# Altium PCB PCB.PcbDoc
Units mm, origin at the board's own origin, x right, y up, seen from the top; angles counter-clockwise.
Board outline 38.61 x 38.61 mm, 4 copper layers (Top Layer, Signal Layer 1, Signal Layer 2, Bottom Layer), stack 1.54 mm thick; 17 components, 95 nets, 294 pads, 81 vias.
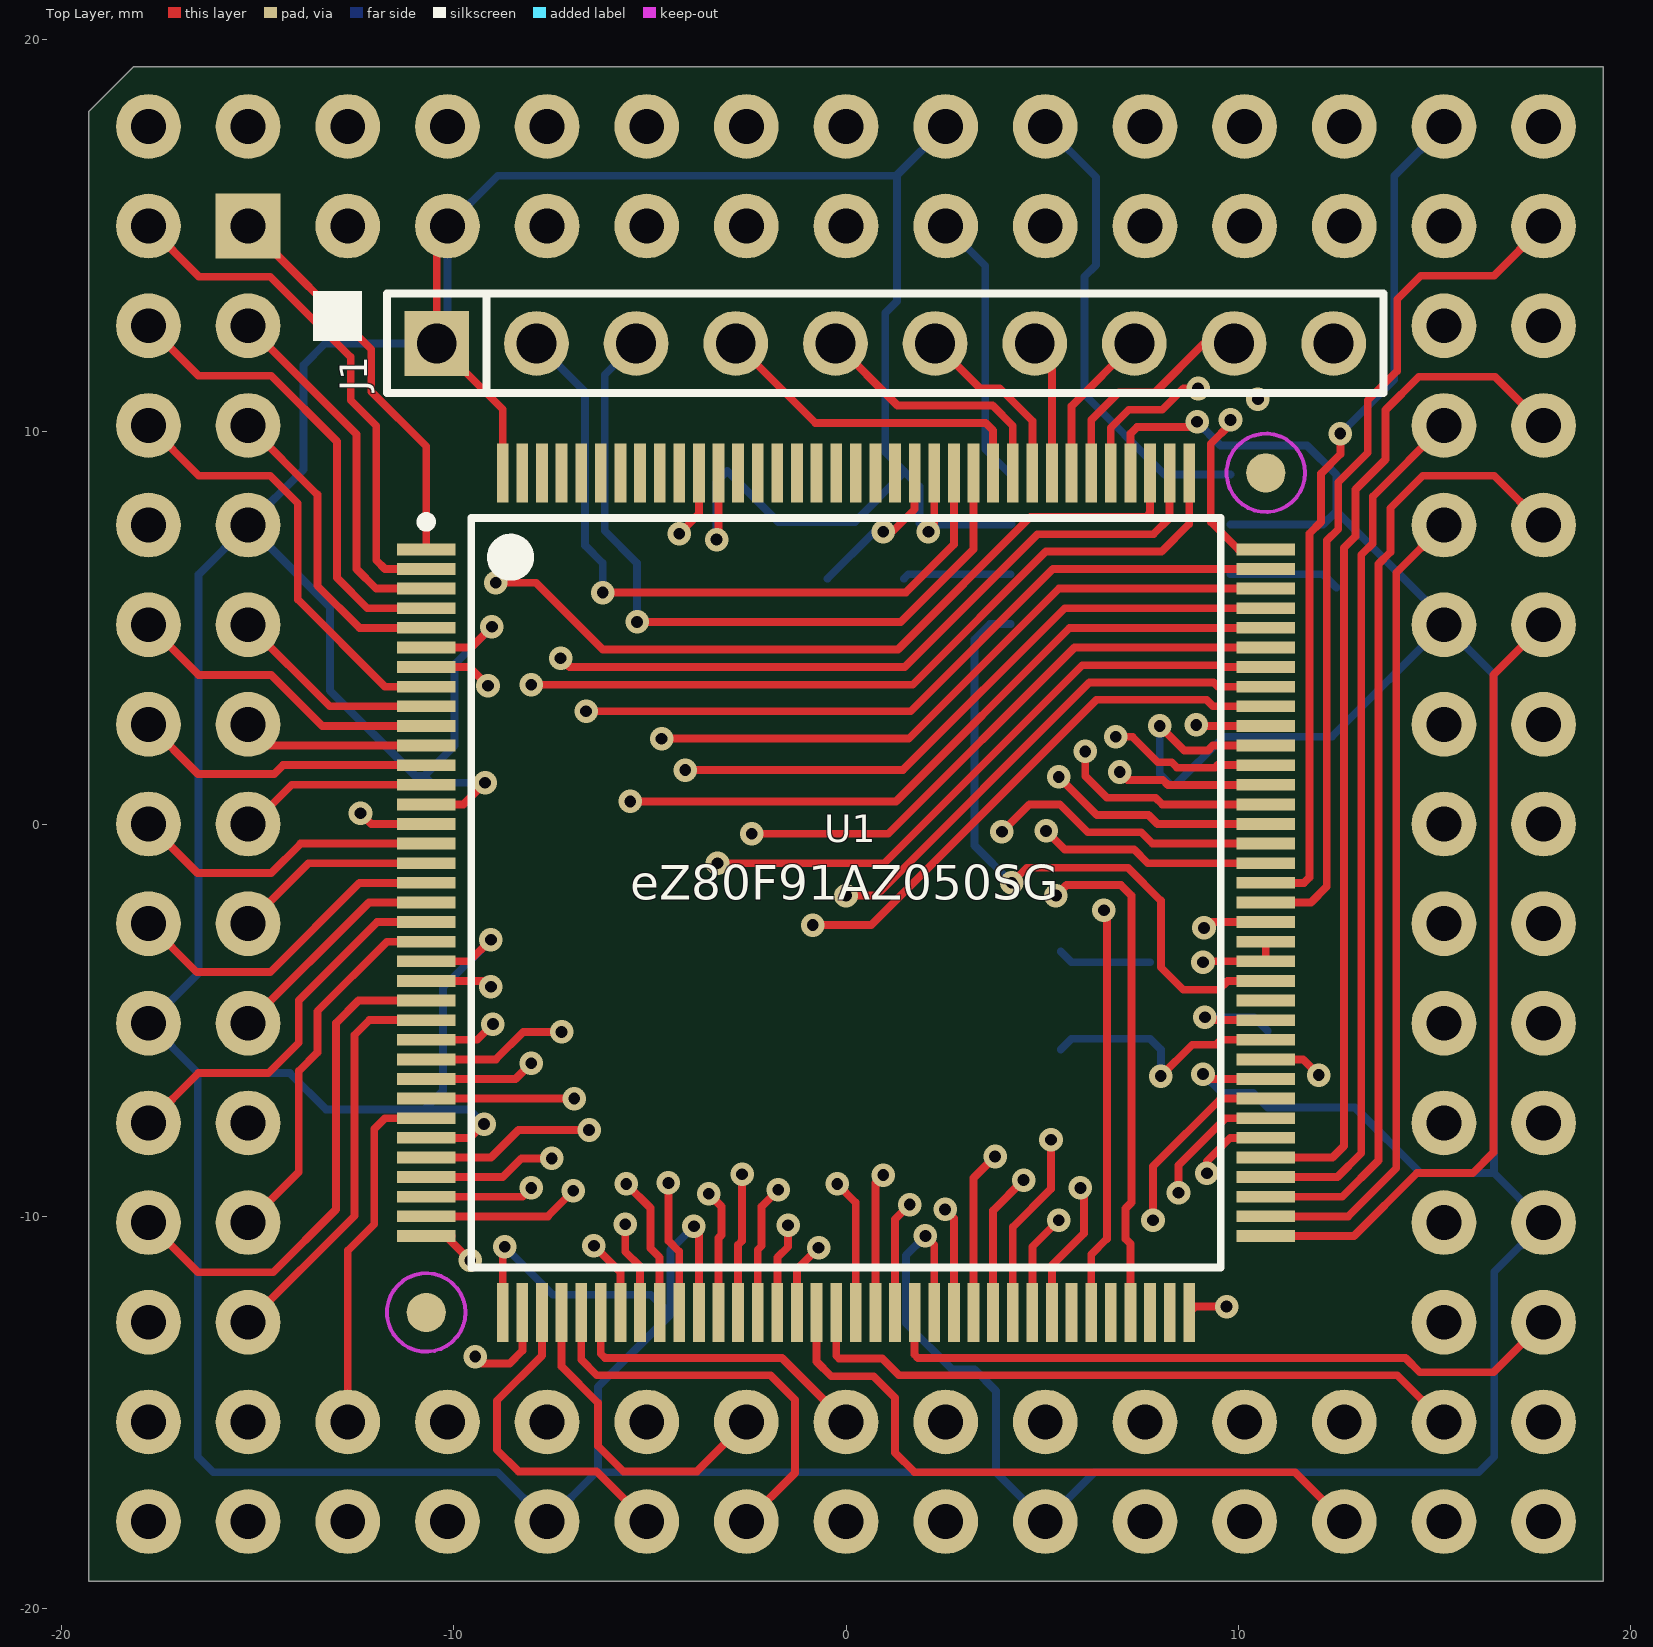
[diagram p0: Top Layer view]
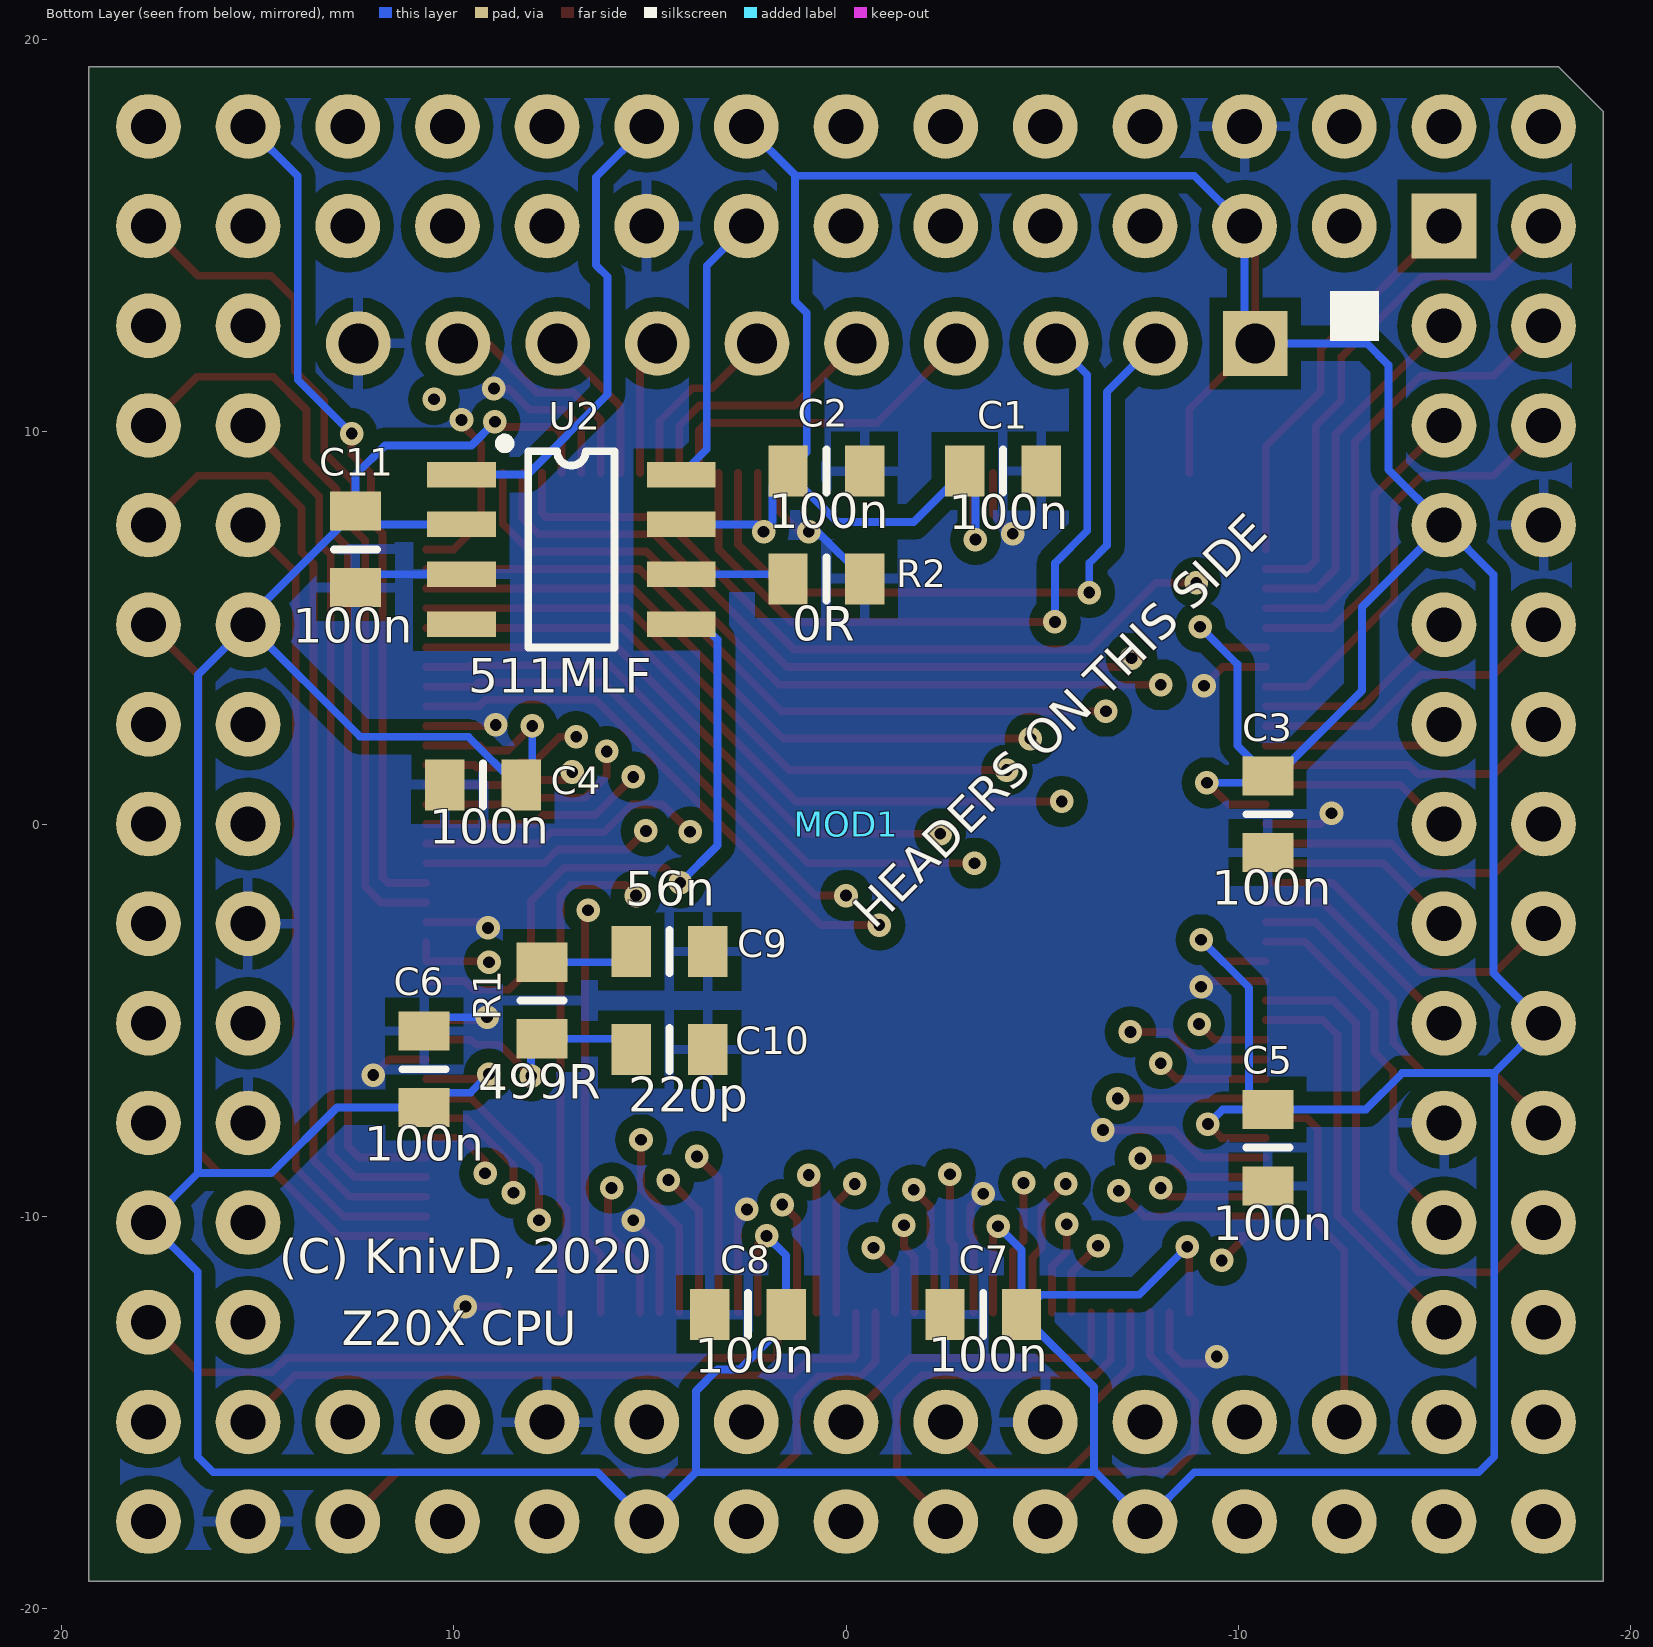
[diagram p1: Bottom Layer view, seen from below]
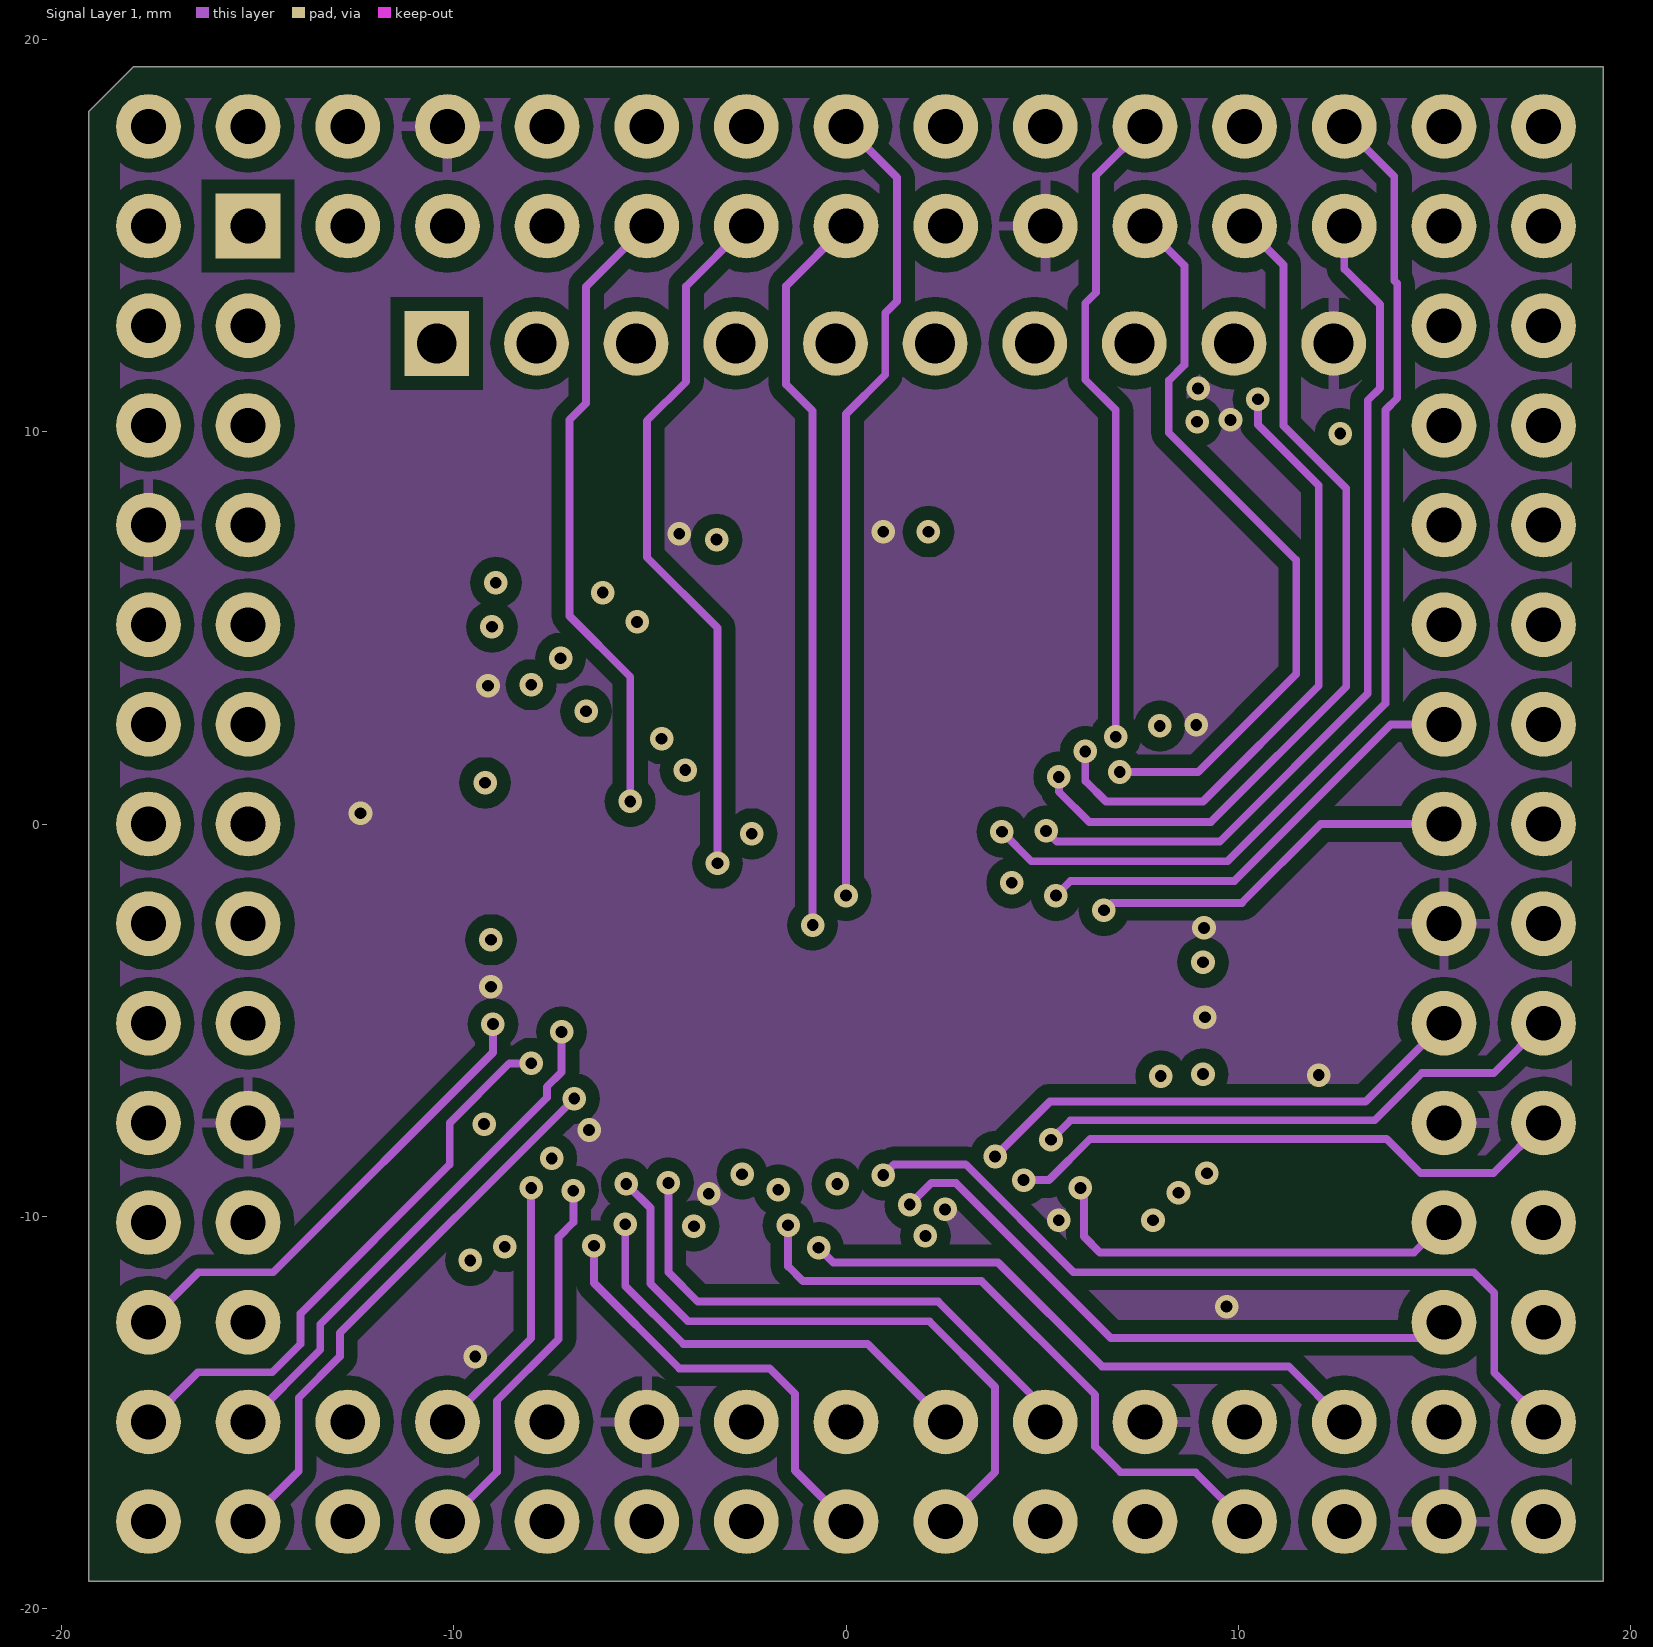
[diagram p2: Signal Layer 1]
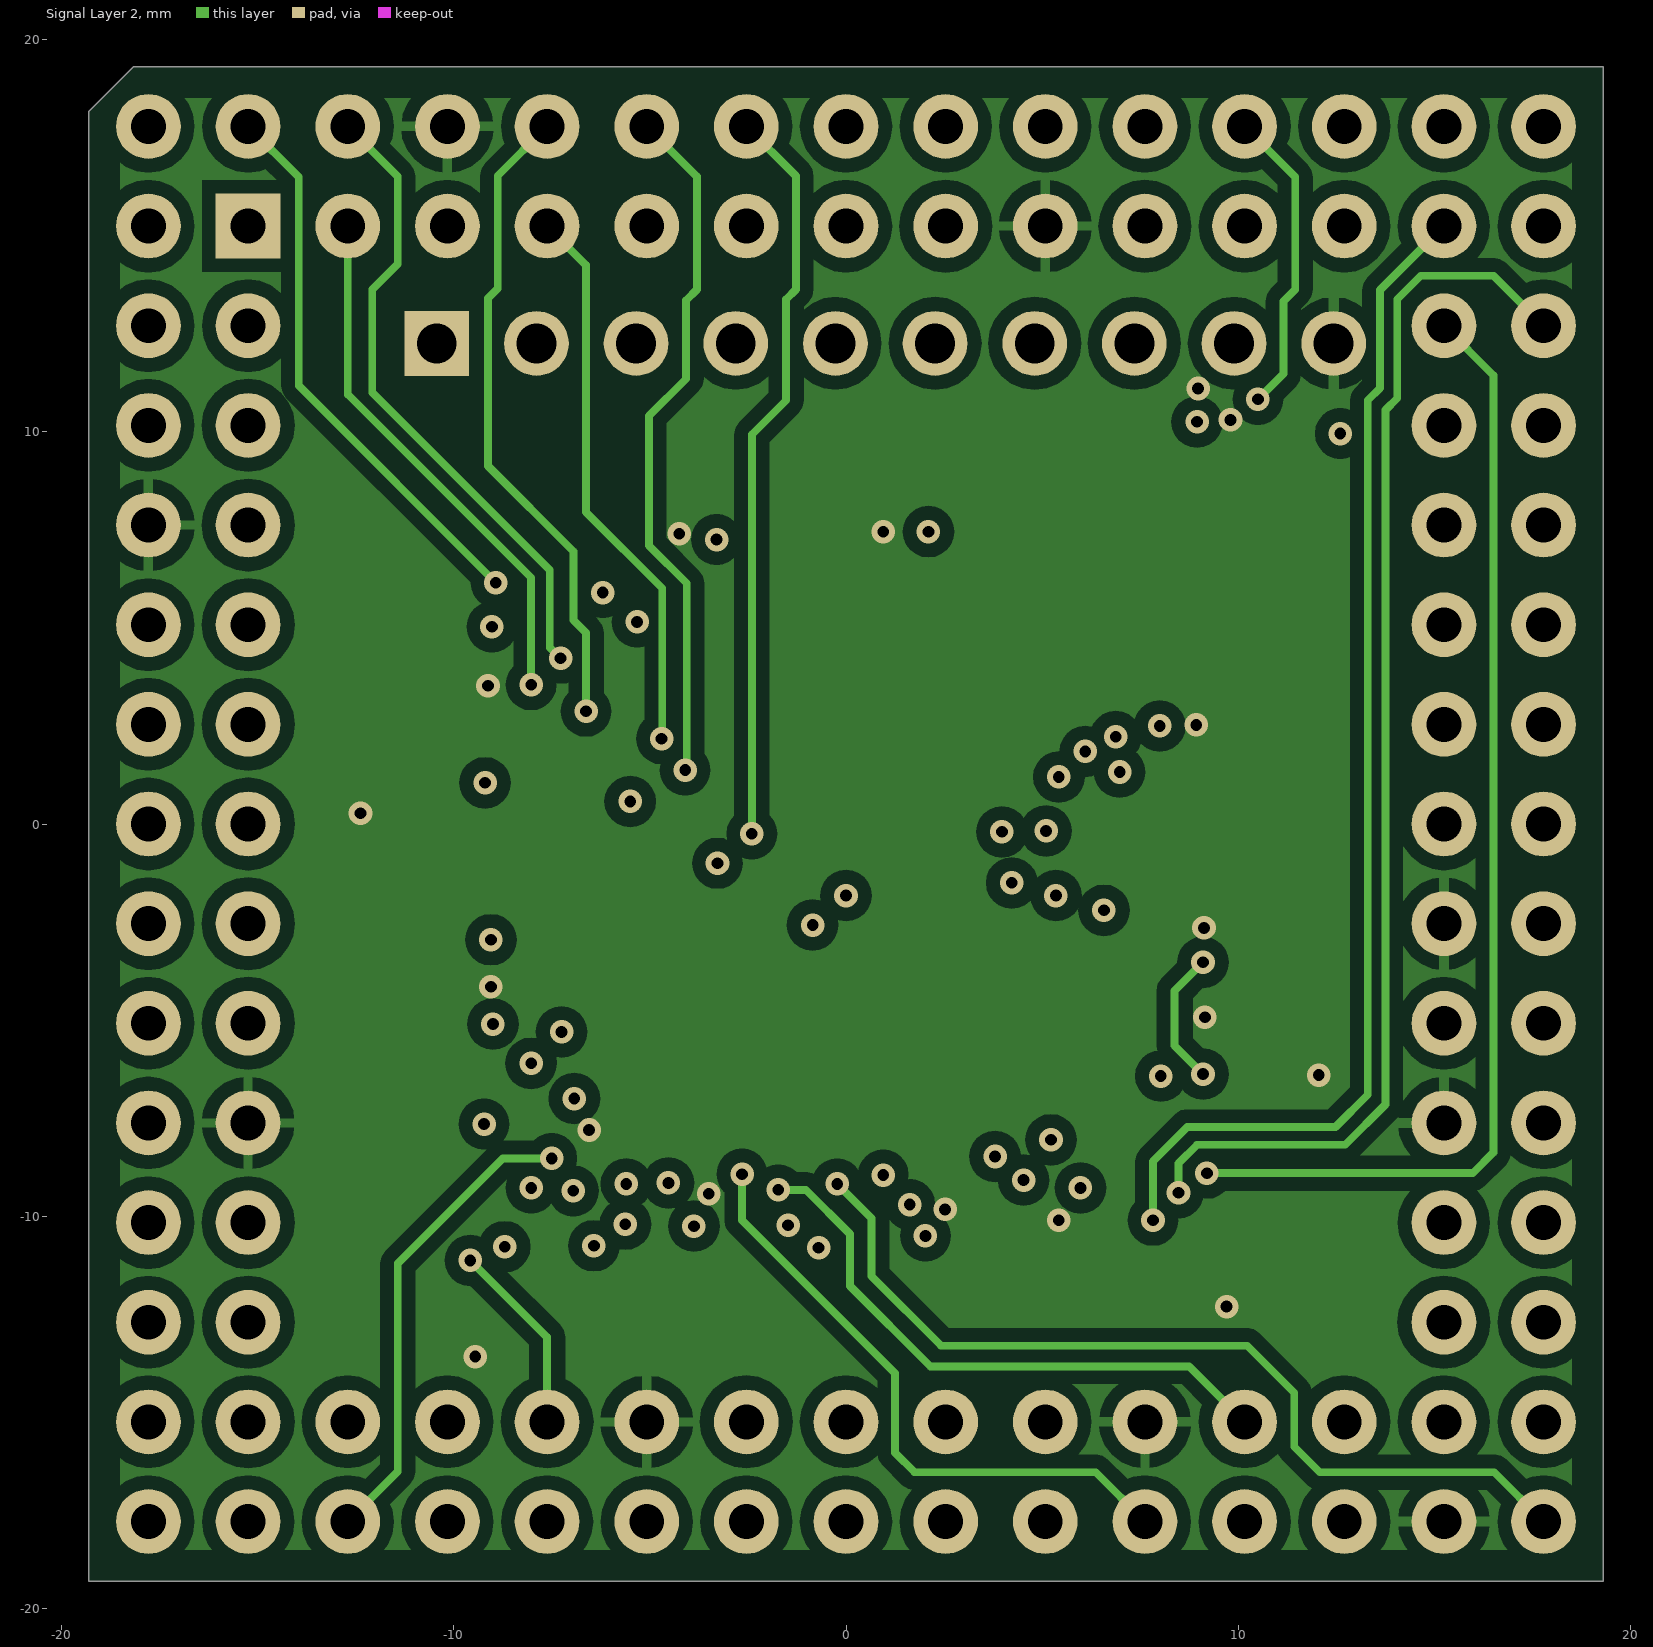
[diagram p3: Signal Layer 2]
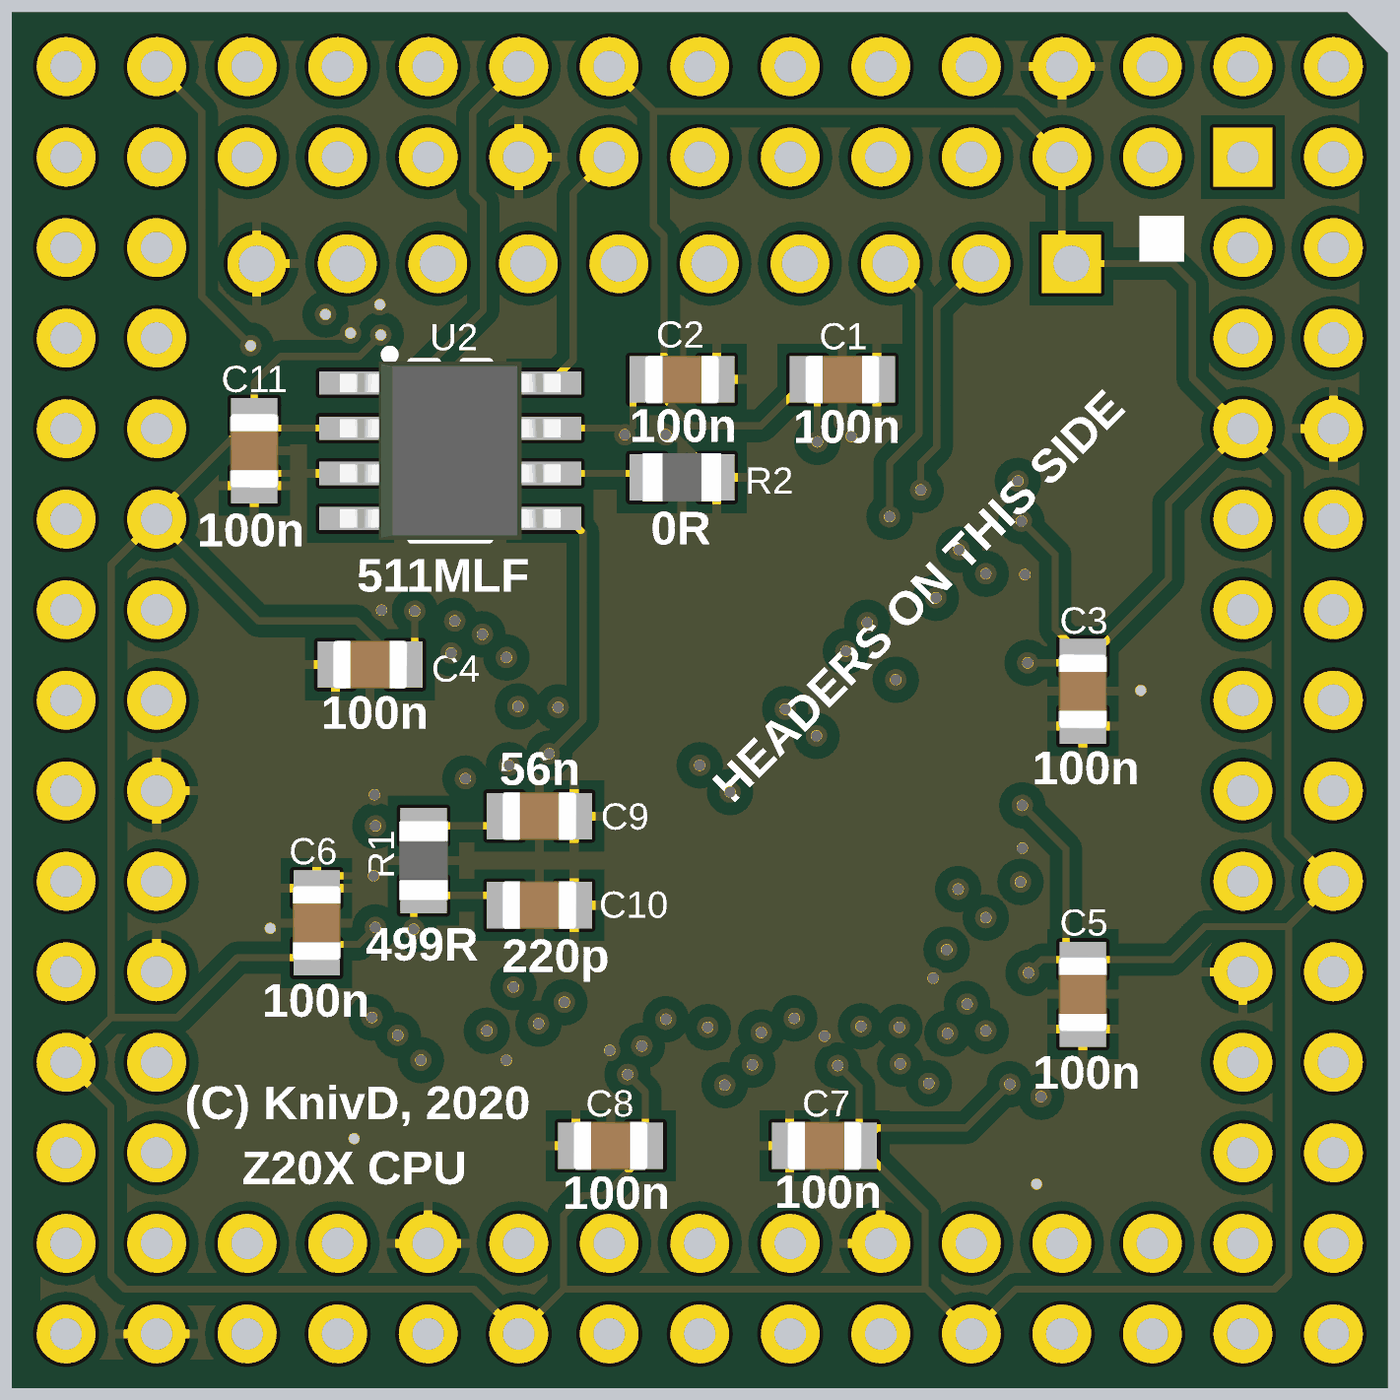
[diagram p4: 3D render of the assembled board from below, using the file's embedded part models]

## Layer stack, top to bottom
Top Solder: solder mask 0.0102, Solder Resist, Dk 3.5
Top Layer: signal copper 0.0356
Dielectric 1: core 0.508, FR-4, Dk 4.2
Signal Layer 1: signal copper 0.036
Dielectric 3: prepreg 0.381, Dk 4.2
Signal Layer 2: signal copper 0.036
Dielectric 2: core 0.508, Dk 4.2
Bottom Layer: signal copper 0.0356
Solder Side: solder mask 0.0102, Solder Resist, Dk 3.5

## Board outline
-19.304,-19.304 -19.304,18.161 -18.161,19.304 19.304,19.304 19.304,-19.304

## Design rules (kind name [scope] priority, off if disabled: settings)
Clearance Clearance_Poly [(IsRegion)] p1: gap=0.35 ignorepadtopadclearanceinfootprint=TRUE
Clearance [All] p2: gap=0.24 ignorepadtopadclearanceinfootprint=TRUE
DiffPairsRouting [All] p1: maxlimit=1 minlimit=0.15 mostfreqgap=0.2 toplayer_minwidth=0.2 toplayer_maxwidth=1 toplayer_prefwidth=0.2 midlayer1_minwidth=0.2 midlayer1_maxwidth=1 midlayer1_prefwidth=0.2 midlayer2_minwidth=0.2 midlayer2_maxwidth=1 midlayer2_prefwidth=0.2 bottomlayer_minwidth=0.2 bottomlayer_maxwidth=1 bottomlayer_prefwidth=0.2 maxuncoupledlength=12.7
HoleSize [All] p1 off: absolutevalues=TRUE maxlimit=2.5 minlimit=0.025 maxpercent=80.000 minpercent=20.000
HoleToHoleClearance [All] p1 off: gap=0 allowstackedmicrovias=TRUE
LayerPairs [All] p1 off: enforce=TRUE
MaxMinImpedance [InNet('ANT50R')] p1: minimum=49.90 maximum=50.10
MinimumSolderMaskSliver [All] p1 off: minsoldermaskwidth=-50
NetAntennae [All] p1 off: netantennaetolerance=0
PlaneClearance [All] p1: clearance=0.5
PlaneConnect [All] p1: planeconnectstyle=Direct reliefexpansion=0.5 reliefentries=4 reliefconductorwidth=0.35 reliefairgap=0.35
PolygonConnect [All] p1: thpad.connectstyle=Relief thpad.reliefconductorwidth=0.25 thpad.reliefentries=4 thpad.polygonreliefangle="90 Angle" thpad.airgapwidth=0.35 smdpad.connectstyle=Relief smdpad.reliefconductorwidth=0.25 smdpad.reliefentries=4 smdpad.polygonreliefangle="90 Angle" smdpad.airgapwidth=0.35 via.connectstyle=Direct via.reliefconductorwidth=0.35 via.reliefentries=4 via.polygonreliefangle="90 Angle" via.airgapwidth=0.35
RoutingCorners [All] p1: cornerstyle=45-Degree minsetback=2 maxsetback=2
RoutingVias [All] p1: holewidth=0.3 width=0.6 viastyle="Through Hole" minholewidth=0.3 minwidth=0.6 maxholewidth=1 maxwidth=2
SilkToBoardRegionClearance [All] p1 off:
SilkToSilkClearance [All] p1 off: silktosilkclearance=-50
SilkToSolderMaskClearance [IsPad] p1 off: minsilkscreentomaskgap=-50 clearancetoexposedcopper=TRUE
SolderMaskExpansion [All] p1: expansion=0.102
Width [All] p1: maxlimit=0.5 minlimit=0.2 preferedwidth=0.2
18 further rules are at their usual default settings.

## Components (designator, comment, footprint, x,y, rotation, side; value= is the part's Value field where it differs from the comment)
C1 "100n" _0805_CAP -4,9 r180 bottom locked
C2 "100n" _0805_CAP 0.5,9 r0 bottom locked
C3 "100n" _0805_CAP -10.75,0.25 r270 bottom locked
C4 "100n" _0805_CAP 9.25,1 r180 bottom locked
C5 "100n" _0805_CAP -10.75,-8.25 r270 bottom locked
C6 "100n" _0805_CAP 10.75,-6.25 r90 bottom locked
C7 "100n" _0805_CAP -3.5,-12.5 r0 bottom locked
C8 "100n" _0805_CAP 2.5,-12.5 r0 bottom locked
C9 "56n" _0805_CAP 4.5,-3.25 r180 bottom locked
C10 "220p" _0805_CAP 4.5,-5.75 r180 bottom locked
C11 "100n" _0805_CAP 12.5,7 r90 bottom locked
J1 "DNF" 2011-1X10S 1,12.25 r0 top locked
MOD1 "Z20X CPU Module" PGA100X15 0,0 r0 bottom locked
R1 "499R" _0805_RES 7.75,-4.5 r90 bottom locked
R2 "0R" _0805_RES 0.5,6.25 r0 bottom locked
U1 "eZ80F91AZ050SG" QFP50P2200X2200X160-144N 0,-1.75 r0 top locked
U2 "511MLF" SOIC8 7,7 r270 bottom locked

## Footprints (in the part's own frame and the unit in brackets; to place one, negate y for a bottom-side part, rotate by r counter-clockwise, add the part's x,y. Pads: shape width x height; smd on the part's side, far side on the other; paste and mask are expansions set on the pad)
2011-1X10S [mil] "2011-1X10 Straight Pin Header"
  rect 65x65 hole 40: 1(-450,0)
  round 65 hole 40: 2(-350,0) 3(-250,0) 4(-150,0) 5(-50,0) 6(50,0) 7(150,0) 8(250,0) 9(350,0) 10(450,0)
  silkscreen extent -500,-50 500,50
_0805_CAP [mm]
  rect 1x1.3 smd: 1(-0.975,0) 2(0.975,0)
  silkscreen extent 0,-0.55 0,0.55, body extent -1.05,-0.67 1.05,0.68, height 1.1
_0805_RES [mm]
  rect 1x1.3 smd: 1(-0.975,0) 2(0.975,0)
  silkscreen extent 0,-0.55 0,0.55, body extent -1.1,-0.67 1.1,0.67, height 0.6
PGA100X15 [mil] "PGA module, 100 pins, 2.54 pitch"
  rect 65x65 hole 35: 1(-600,-600)
  round 65 hole 35: 2(-700,-600) 3(-600,-500) 4(-700,-500) 5(-600,-400) 6(-700,-400) 7(-600,-300) 8(-700,-300) 9(-600,-200) 10(-700,-200) 11(-600,-100) 12(-700,-100) 13(-600,0) 14(-700,0) 15(-600,100) 16(-700,100) 17(-600,200) 18(-700,200) 19(-600,300) 20(-700,300) 21(-600,400) 22(-700,400) 23(-600,500) 24(-700,500) 25(-600,600) 26(-700,600) 27(-600,700) 28(-500,600) 29(-500,700) 30(-400,600) 31(-400,700) 32(-300,600) 33(-300,700) 34(-200,600) 35(-200,700) 36(-100,600) 37(-100,700) 38(0,600) 39(0,700) 40(100,600) 41(100,700) 42(200,600) 43(200,700) 44(300,600) 45(300,700) 46(400,600) 47(400,700) 48(500,600) 49(500,700) 50(600,600) 51(600,700) 52(700,600) 53(600,500) 54(700,500) 55(600,400) 56(700,400) 57(600,300) 58(700,300) 59(600,200) 60(700,200) 61(600,100) 62(700,100) 63(600,0) 64(700,0) 65(600,-100) 66(700,-100) 67(600,-200) 68(700,-200) 69(600,-300) 70(700,-300) 71(600,-400) 72(700,-400) 73(600,-500) 74(700,-500) 75(600,-600) 76(700,-600) 77(600,-700) 78(500,-600) 79(500,-700) 80(400,-600) 81(400,-700) 82(300,-600) 83(300,-700) 84(200,-600) 85(200,-700) 86(100,-600) 87(100,-700) 88(0,-600) 89(0,-700) 90(-100,-600) 91(-100,-700) 92(-200,-600) 93(-200,-700) 94(-300,-600) 95(-300,-700) 96(-400,-600) 97(-400,-700) 98(-500,-600) 99(-500,-700) 100(-600,-700) 101(-700,-700) 102(-700,700) 103(700,700) 104(700,-700)
  silkscreen extent -535,-535 -486,-485
QFP50P2200X2200X160-144N [mm] "QFP, 144-Leads, Body 20x20mm (BSC), Pitch 0.50mm, IPC Medium Density"
  round 1 smd paste-0.51 mask+0.5: 0(-10.7,-10.7) 0(10.7,10.7)
  rect 1.5x0.3 smd: 1(-10.7,8.75) 2(-10.7,8.25) 3(-10.7,7.75) 4(-10.7,7.25) 5(-10.7,6.75) 6(-10.7,6.25) 7(-10.7,5.75) 8(-10.7,5.25) 9(-10.7,4.75) 10(-10.7,4.25) 11(-10.7,3.75) 12(-10.7,3.25) 13(-10.7,2.75) 14(-10.7,2.25) 15(-10.7,1.75) 16(-10.7,1.25) 17(-10.7,0.75) 18(-10.7,0.25) 19(-10.7,-0.25) 20(-10.7,-0.75) 21(-10.7,-1.25) 22(-10.7,-1.75) 23(-10.7,-2.25) 24(-10.7,-2.75) 25(-10.7,-3.25) 26(-10.7,-3.75) 27(-10.7,-4.25) 28(-10.7,-4.75) 29(-10.7,-5.25) 30(-10.7,-5.75) 31(-10.7,-6.25) 32(-10.7,-6.75) 33(-10.7,-7.25) 34(-10.7,-7.75) 35(-10.7,-8.25) 36(-10.7,-8.75) 73(10.7,-8.75) 74(10.7,-8.25) 75(10.7,-7.75) 76(10.7,-7.25) 77(10.7,-6.75) 78(10.7,-6.25) 79(10.7,-5.75) 80(10.7,-5.25) 81(10.7,-4.75) 82(10.7,-4.25) 83(10.7,-3.75) 84(10.7,-3.25) 85(10.7,-2.75) 86(10.7,-2.25) 87(10.7,-1.75) 88(10.7,-1.25) 89(10.7,-0.75) 90(10.7,-0.25) 91(10.7,0.25) 92(10.7,0.75) 93(10.7,1.25) 94(10.7,1.75) 95(10.7,2.25) 96(10.7,2.75) 97(10.7,3.25) 98(10.7,3.75) 99(10.7,4.25) 100(10.7,4.75) 101(10.7,5.25) 102(10.7,5.75) 103(10.7,6.25) 104(10.7,6.75) 105(10.7,7.25) 106(10.7,7.75) 107(10.7,8.25) 108(10.7,8.75)
  rect 0.3x1.5 smd: 37(-8.75,-10.7) 38(-8.25,-10.7) 39(-7.75,-10.7) 40(-7.25,-10.7) 41(-6.75,-10.7) 42(-6.25,-10.7) 43(-5.75,-10.7) 44(-5.25,-10.7) 45(-4.75,-10.7) 46(-4.25,-10.7) 47(-3.75,-10.7) 48(-3.25,-10.7) 49(-2.75,-10.7) 50(-2.25,-10.7) 51(-1.75,-10.7) 52(-1.25,-10.7) 53(-0.75,-10.7) 54(-0.25,-10.7) 55(0.25,-10.7) 56(0.75,-10.7) 57(1.25,-10.7) 58(1.75,-10.7) 59(2.25,-10.7) 60(2.75,-10.7) 61(3.25,-10.7) 62(3.75,-10.7) 63(4.25,-10.7) 64(4.75,-10.7) 65(5.25,-10.7) 66(5.75,-10.7) 67(6.25,-10.7) 68(6.75,-10.7) 69(7.25,-10.7) 70(7.75,-10.7) 71(8.25,-10.7) 72(8.75,-10.7) 109(8.75,10.7) 110(8.25,10.7) 111(7.75,10.7) 112(7.25,10.7) 113(6.75,10.7) 114(6.25,10.7) 115(5.75,10.7) 116(5.25,10.7) 117(4.75,10.7) 118(4.25,10.7) 119(3.75,10.7) 120(3.25,10.7) 121(2.75,10.7) 122(2.25,10.7) 123(1.75,10.7) 124(1.25,10.7) 125(0.75,10.7) 126(0.25,10.7) 127(-0.25,10.7) 128(-0.75,10.7) 129(-1.25,10.7) 130(-1.75,10.7) 131(-2.25,10.7) 132(-2.75,10.7) 133(-3.25,10.7) 134(-3.75,10.7) 135(-4.25,10.7) 136(-4.75,10.7) 137(-5.25,10.7) 138(-5.75,10.7) 139(-6.25,10.7) 140(-6.75,10.7) 141(-7.25,10.7) 142(-7.75,10.7) 143(-8.25,10.7) 144(-8.75,10.7)
  Top Layer keep-out circle w0.1: c-10.7,-10.7 r1
  Top Layer keep-out circle w0.1: c10.7,10.7 r1
  silkscreen extent -10.82,-9.55 9.55,9.57, body extent -11,-11 11,11, height 1.6
SOIC8 [mm] "SOIC8 Package"
  rect 0.65x1.75 smd: 1(-1.905,-2.8) 2(-0.635,-2.8) 3(0.635,-2.8) 4(1.905,-2.8) 5(1.905,2.8) 6(0.635,2.8) 7(-0.635,2.8) 8(-1.905,2.8)
  silkscreen extent -2.82,-1.83 2.5,1.1, body extent -2.5,-3.1 2.5,3.1, height 1.75

## Part data
C1 C2 C3 C4 C5 C6 C7 C8 C9 C10 C11: library part Capacitor, "Capacitor"
J1: library part "Connector 1x10", "Single row, 10-way connector"
R1 R2: library part Resistor, "Resistor"
U1: library part eZ80F91, "eZ80Acclaim!® Flash Microcontrollers", Manufacturer=Zilog
U2: library part ICS511, "LOCO(tm) PLL CLOCK MULTIPLIER"

## Via types
v1: diameter 0.6, hole 0.3, Top Layer to Bottom Layer, tented both sides, 81 vias

## Nets (pads, with @x,y where several pads share a name; then routed paths per layer and width w, separated by ;. In a path a pad name is that pad's centre, name@x,y a point inside that pad or via, vN(x,y) a via of type N, cw(c..) or ccw(c..) an arc to the next point about the centre after c; other vN are vias at no path point)
+3V3: C1.1 C2.2 C3.1 C4.2 C5.1 C6.1 C7.1 C8.1 C11.2 J1.1 MOD1.7 MOD1.18 MOD1.33 MOD1.43 MOD1.56 MOD1.67 MOD1.87 MOD1.96 U1.6 U1.14 U1.22 U1.31 U1.37 U1.47 U1.59 U1.81 U1.87 U1.88 U1.98 U1.112 U1.122 U1.133 U1.144 U2.2 U2.7 | length 242.4
  Top Layer w0.2: U1.31 -9.575,-8 v1(-9.225,-7.65) ; U1.22 -9.6,-3.5 v1(-9.05,-2.95) ; U1.14 -9.75,0.5 v1(-9.2,1.05) ; U1.6 -9.55,4.5 v1(-9.025,5.025) ; MOD1.96 -10.43,14.97 J1.1 -8.75,10.57 U1.144 ; U1.37 -8.75,-10.825 v1(-8.7,-10.775) ; v1(-3.875,-10.25) -3.75,-10.375 U1.47 ; v1(-3.3,7.25) -3.25,7.3 U1.133 ; v1(2.025,-10.5) 2.25,-10.725 U1.59 ; v1(2.1,7.45) 2.25,7.6 U1.122 ; U1.112 7.25,9.95 7.42,10.12 8.82,10.12 v1(8.95,10.25) ; v1(7.997,2.5) 8.622,1.875 9.225,1.875 9.35,2 U1.98 ; v1(9.1,-6.375) 9.225,-6.5 U1.81 ; v1(9.1,-3.525) 9.125,-3.5 U1.87 U1.88
  Signal Layer 2 w0.2: v1(9.1,-6.375) 8.375,-5.65 8.375,-4.25 v1(9.1,-3.525)
  Bottom Layer w0.2: v1(-9.225,-7.65) -9.6,-7.275 C5.1 ; v1(-9.2,1.05) -10.575,1.05 C3.1 ; v1(-9.05,-2.95) -10.275,-4.175 -10.275,-6.8 C5.1 ; v1(-9.025,5.025) -9.975,4.075 -9.975,2 C3.1 ; v1(-8.7,-10.775) -7.475,-12 -4.975,-12 C7.1 ; v1(-3.875,-10.25) -4.475,-10.85 C7.1 ; v1(-3.3,7.25) -3.3,8.725 C1.1 -1.725,7.7 0.225,7.7 1.475,8.95 C2.2 ; v1(2.025,-10.5) 1.525,-11 C8.1 1.525,-12.725 2.7,-13.9 3.275,-13.9 3.825,-14.45 3.825,-16.525 ; MOD1.87 1.3,16.54 ; U2.7@4.215,7.65 U2.7 2.285,7.635 v1(2.1,7.45) 1.875,7.675 1.875,8.6 C2.2 ; v1(7.997,2.5) 7.997,1.278 C4.2 8.4,1 9.625,2.225 12.385,2.225 MOD1.67 ; v1(8.95,10.25) 8.95,10.245 9.545,9.65 11.75,9.65 12.5,8.9 C11.2 ; v1(9.1,-6.375) 9.575,-6.85 10.375,-6.85 C6.1 12.975,-7.225 14.65,-8.9 16.52,-8.9 ; U2.2 12.16,7.635 C11.2 ; -16.51,-6.35 -14.175,-6.35 -13.25,-7.275 C5.1 ; -16.51,-6.35 MOD1.18 -16.5,-3.8 -16.5,6.36 MOD1.7 ; -16.51,-6.35 -16.525,-6.365 -16.525,-16.125 -16.125,-16.525 -8.875,-16.525 MOD1.33 -6.325,-16.485 ; MOD1.7 -13.15,5.53 -13.15,3.4 -10.975,1.225 C3.1 ; MOD1.7 -13.825,9.035 -13.825,11.7 -13.275,12.25 J1.1 -10.16,12.52 MOD1.96 -8.875,16.525 1.285,16.525 1.3,16.54 ; -6.325,-16.485 -6.325,-14.35 C7.1 ; -6.325,-16.485 -6.285,-16.525 3.825,-16.525 ; 1.3,16.54 1.3,13.325 1,13.025 1,9.475 C2.2 ; 3.825,-16.525 MOD1.43 6.335,-16.525 16.125,-16.525 16.525,-16.125 16.525,-11.415 MOD1.56 16.52,-8.9 ; C11.2 15.24,5.235 MOD1.67 ; MOD1.67 16.52,3.8 16.52,-8.9
A0: MOD1.1 U1.1 | length 10.1
  Top Layer w0.2: MOD1.1 -12.1,12.1 -12.1,11.025 -10.7,9.625 U1.1
A1: MOD1.2 U1.2 | length 13.4
  Top Layer w0.2: MOD1.2 -16.49,13.95 -14.675,13.95 -12.625,11.9 -12.625,10.8 -11.975,10.15 -11.975,6.725 -11.75,6.5 U1.2
A2: MOD1.3 U1.3 | length 9.3
  Top Layer w0.2: MOD1.3 -12.475,9.935 -12.475,6.5 -11.975,6 U1.3
A3: MOD1.4 U1.4 | length 12.1
  Top Layer w0.2: MOD1.4 -16.505,11.425 -14.65,11.425 -12.975,9.75 -12.975,6.275 -12.2,5.5 U1.4
A4: MOD1.5 U1.5 | length 8
  Top Layer w0.2: MOD1.5 -13.475,8.395 -13.475,6.075 -12.4,5 U1.5
A5: MOD1.6 U1.8 | length 11.3
  Top Layer w0.2: MOD1.6 -16.495,8.875 -14.675,8.875 -13.975,8.175 -13.975,5.725 -11.75,3.5 U1.8
A6: MOD1.9 U1.9 | length 5.4
  Top Layer w0.2: MOD1.9 -13.16,3 U1.9
A7: MOD1.10 U1.10 | length 8.1
  Top Layer w0.2: MOD1.10 -16.5,3.8 -14.65,3.8 -13.35,2.5 U1.10
A8: MOD1.11 U1.11 | length 4.8
  Top Layer w0.2: MOD1.11 -14.7,2 U1.11
A9: MOD1.12 U1.12 | length 7.7
  Top Layer w0.2: MOD1.12 -16.515,1.275 -14.575,1.275 -14.35,1.5 U1.12
A10: MOD1.13 U1.13 | length 5
  Top Layer w0.2: MOD1.13 -15.128,0 -14.128,1 U1.13
A11: MOD1.14 U1.16 | length 7.9
  Top Layer w0.2: MOD1.14 -16.53,-1.25 -14.65,-1.25 -13.9,-0.5 U1.16
A12: MOD1.15 U1.17 | length 5.2
  Top Layer w0.2: MOD1.15 -13.7,-1 U1.17
A13: MOD1.16 U1.18 | length 8.5
  Top Layer w0.2: MOD1.16 -16.545,-3.775 -14.675,-3.775 -12.4,-1.5 U1.18
A14: MOD1.17 U1.19 | length 5.8
  Top Layer w0.2: MOD1.17 -12.16,-2 U1.19
A15: MOD1.20 U1.20 | length 9.8
  Top Layer w0.2: MOD1.20 -16.51,-6.35 -14.725,-6.35 -13.95,-5.575 -13.95,-4.5 -11.95,-2.5 U1.20
A16: MOD1.21 U1.21 | length 9.6
  Top Layer w0.2: MOD1.21 -13.95,-8.87 -13.95,-6.3 -13.475,-5.825 -13.475,-4.775 -11.7,-3 U1.21
A17: MOD1.22 U1.24 | length 13.3
  Top Layer w0.2: MOD1.22 -16.515,-11.425 -14.6,-11.425 -13,-9.825 -13,-5.075 -12.425,-4.5 U1.24
A18: MOD1.23 U1.25 | length 10.4
  Top Layer w0.2: MOD1.23 -12.525,-9.985 -12.525,-5.375 -12.15,-5 U1.25
A19: MOD1.24 U1.26 | length 14.2
  Top Layer w0.2: U1.26 -9.4,-5.5 v1(-9,-5.1)
  Signal Layer 1 w0.2: MOD1.24 -16.505,-11.425 -14.6,-11.425 -9,-5.825 v1(-9,-5.1)
A20: MOD1.25 U1.27 | length 17
  Top Layer w0.2: U1.27 -8.925,-6 -8.225,-5.3 v1(-7.25,-5.3)
  Signal Layer 1 w0.2: MOD1.25 -13.4,-13.4 -13.4,-12.75 -7.625,-6.975 -7.625,-6.7 -7.25,-6.325 v1(-7.25,-5.3)
A21: MOD1.26 U1.28 | length 17.5
  Top Layer w0.2: U1.28 -8.425,-6.5 v1(-8.025,-6.1)
  Signal Layer 1 w0.2: MOD1.26 -16.515,-13.975 -14.625,-13.975 -13.9,-13.25 -13.9,-12.475 -10.1,-8.675 -10.1,-7.62 -8.58,-6.1 v1(-8.025,-6.1)
A22: MOD1.27 U1.29 | length 18
  Top Layer w0.2: U1.29 v1(-6.925,-7)
  Signal Layer 1 w0.2: MOD1.27 -13.95,-16.49 -13.95,-14.625 -12.9,-13.575 -12.9,-12.975 v1(-6.925,-7)
A23: MOD1.28 U1.30 | length 9.2
  Top Layer w0.2: MOD1.28 -12.7,-10.875 -12.025,-10.2 -12.025,-7.775 -11.75,-7.5 U1.30
BACK#: MOD1.54 U1.58 | length 17.8
  Top Layer w0.2: U1.58 1.75,-13.525 1.835,-13.61 14.26,-13.61 14.625,-13.975 16.505,-13.975 MOD1.54
BKLA: MOD1.78 U1.92 | length 28.2
  Top Layer w0.2: v1(5.1,-0.175) 5.575,-0.65 7.344,-0.65 7.695,-1 U1.92
  Signal Layer 1 w0.2: v1(5.1,-0.175) 5.375,-0.45 9.525,-0.45 13.3,3.325 13.3,10.8 13.61,11.11 13.61,13.24 12.7,14.15 MOD1.78
BREQ#: MOD1.53 U1.57 | length 18.5
  Top Layer w0.2: U1.57 1.25,-10.075 v1(1.625,-9.7)
  Signal Layer 1 w0.2: v1(1.625,-9.7) 2.175,-9.15 2.8,-9.15 6.75,-13.1 14.84,-13.1 MOD1.53
CLK: U1.86 U2.5 | length 16.7
  Top Layer w0.2: v1(4.225,-1.5) 4.609,-1.116 7.188,-1.116 8.025,-1.953 8.025,-3.65 8.6,-4.225 9.5,-4.225 9.725,-4 U1.86
  Bottom Layer w0.2: U2.5 3.67,5.095 3.275,4.7 3.275,-0.55 v1(4.225,-1.5)
CS0#: MOD1.29 U1.33 | length 15.5
  Top Layer w0.2: U1.33 -8.75,-9 -8.275,-8.525 v1(-7.5,-8.525)
  Signal Layer 2 w0.2: MOD1.29 -11.425,-16.505 -11.425,-11.2 -8.75,-8.525 v1(-7.5,-8.525)
CS1#: MOD1.30 U1.34 | length 9.6
  Top Layer w0.2: U1.34 -8.25,-9.5 v1(-8.025,-9.275)
  Signal Layer 1 w0.2: MOD1.30 -8.025,-13.105 v1(-8.025,-9.275)
CS2#: MOD1.31 U1.35 | length 13.8
  Top Layer w0.2: U1.35 -7.6,-10 v1(-6.95,-9.35)
  Signal Layer 1 w0.2: MOD1.31 -8.9,-16.52 -8.9,-14.7 -7.325,-13.125 -7.325,-10.525 -6.95,-10.15 v1(-6.95,-9.35)
CS3#: MOD1.32 U1.36 | length 6.5
  Top Layer w0.2: U1.36 U1.36@-10.2,-10.5 ; U1.36@-10.05,-10.5 U1.36@-10.2,-10.5 ; v1(-9.575,-11.125) U1.36@-10.2,-10.5
  Signal Layer 2 w0.2: v1(-9.575,-11.125) -7.62,-13.08 MOD1.32
D0: MOD1.35 U1.39 | length 8.6
  Top Layer w0.2: U1.39 -7.75,-13.55 -8.9,-14.7 -8.9,-15.95 -8.35,-16.5 -6.36,-16.5 MOD1.35
D1: MOD1.36 U1.40 | length 8.4
  Top Layer w0.2: U1.40 -7.25,-13.825 -6.325,-14.75 -6.325,-15.85 -5.675,-16.5 -3.8,-16.5 MOD1.36
D2: MOD1.37 U1.41 | length 10.7
  Top Layer w0.2: U1.41 -6.75,-13.65 -6.35,-14.05 -1.925,-14.05 -1.3,-14.675 -1.3,-16.54 MOD1.37
D3: MOD1.38 U1.42 | length 8
  Top Layer w0.2: U1.42 -6.25,-13.5 -6.14,-13.61 -1.63,-13.61 MOD1.38
D4: MOD1.39 U1.43 | length 13
  Top Layer w0.2: v1(-6.425,-10.75) -5.75,-11.425 U1.43
  Signal Layer 1 w0.2: v1(-6.425,-10.75) -6.425,-11.7 -4.25,-13.875 -1.95,-13.875 -1.3,-14.525 -1.3,-16.48 MOD1.39
D5: MOD1.40 U1.44 | length 13.6
  Top Layer w0.2: v1(-5.625,-10.2) -5.625,-10.9 -5.25,-11.275 U1.44
  Signal Layer 1 w0.2: v1(-5.625,-10.2) -5.625,-11.775 -4.15,-13.25 0.55,-13.25 MOD1.40
D6: MOD1.41 U1.45 | length 20.3
  Top Layer w0.2: v1(-5.6,-9.175) -4.985,-9.79 -4.985,-10.815 -4.75,-11.05 U1.45
  Signal Layer 1 w0.2: v1(-5.6,-9.175) -4.985,-9.79 -4.985,-11.715 -4.025,-12.675 2.125,-12.675 3.8,-14.35 3.8,-16.52 MOD1.41
D7: MOD1.42 U1.46 | length 17.1
  Top Layer w0.2: v1(-4.525,-9.15) -4.525,-10.625 -4.25,-10.9 U1.46
  Signal Layer 1 w0.2: v1(-4.525,-9.15) -4.525,-11.425 -3.775,-12.175 2.35,-12.175 5.08,-14.905 MOD1.42
FCPU: MOD1.100 U1.111 | length 34.1
  Top Layer w0.2: v1(-8.925,6.15) -7.9,6.15 -6.2,4.45 1.325,4.45 4.7,7.825 7.65,7.825 7.75,7.925 U1.111
  Signal Layer 2 w0.2: MOD1.100 -13.95,16.49 -13.95,11.175 v1(-8.925,6.15)
GND: C1.2 C2.1 C3.2 C4.1 C5.2 C6.2 C7.2 C8.2 C9.2 C10.2 C11.1 J1.10 MOD1.8 MOD1.19 MOD1.34 MOD1.44 MOD1.51 MOD1.57 MOD1.61 MOD1.84 MOD1.97 R2.1 U1.7 U1.15 U1.23 U1.32 U1.38 U1.48 U1.60 U1.64 U1.72 U1.82 U1.84 U1.89 U1.99 U1.108 U1.113 U1.123 U1.134 U2.3 | length 46.7
  Top Layer w0.2: v1(-12.375,0.275) -12.1,0 U1.15 ; U1.32 -9.05,-8.5 -8.35,-7.8 v1(-6.55,-7.8) ; U1.23 -9.2,-4 v1(-9.05,-4.15) ; U1.7 -9.6,4 v1(-9.125,3.525) ; v1(-9.45,-13.575) -9.275,-13.75 -8.572,-13.75 -8.25,-13.428 U1.38 ; v1(-4.25,7.4) -3.75,7.9 U1.134 ; v1(-3.5,-9.425) -3.175,-9.75 -3.175,-10.475 -3.25,-10.55 U1.48 ; v1(0.95,7.45) 1.175,7.45 1.75,8.025 U1.123 ; v1(2.525,-9.825) 2.75,-10.05 U1.60 ; U1.64 4.75,-10.775 v1(5.425,-10.1) ; U1.113 6.75,10.1 7.21,10.56 8.06,10.56 8.6,11.1 v1(8.975,11.1) ; U1.72 8.9,-12.3 v1(9.7,-12.3) ; v1(8.925,2.525) 8.951,2.5 U1.99 ; v1(9.125,-2.65) 9.275,-2.5 U1.89 ; v1(9.15,-4.925) 9.225,-5 U1.84 ; v1(9.8,10.3) 9.8,10.195 9.298,9.693 9.298,7.702 10,7 U1.108 ; U1.82 11.65,-6 v1(12.05,-6.4)
  Bottom Layer w0.2: R2.1 0.725,7.45 v1(0.95,7.45) ; v1(9.15,-4.925) 10.4,-4.925 C6.2 ; U2.3 12.16,6.365 C11.1
HALT#: MOD1.55 U1.65 | length 14.5
  Top Layer w0.2: U1.65 5.25,-11.25 6.065,-10.435 6.065,-9.365 v1(5.975,-9.275)
  Signal Layer 1 w0.2: v1(5.975,-9.275) 6.065,-9.365 6.065,-10.515 6.475,-10.925 14.475,-10.925 MOD1.55
INST#: MOD1.49 U1.53 | length 17.2
  Top Layer w0.2: U1.53 -0.75,-13.7 -0.375,-14.075 0.699,-14.075 1.25,-14.625 1.25,-16.025 1.75,-16.525 11.445,-16.525 MOD1.49
IORQ#: MOD1.45 U1.49 | length 19.4
  Top Layer w0.2: U1.49 -2.75,-10.725 -2.65,-10.625 v1(-2.65,-8.925)
  Signal Layer 2 w0.2: v1(-2.65,-8.925) -2.65,-10.1 1.25,-14 1.25,-16.025 1.75,-16.525 6.365,-16.525 MOD1.45
MISO: MOD1.94 U1.106 | length 31.3
  Top Layer w0.2: v1(-4.7,2.175) 1.6,2.175 5.425,6 U1.106
  Signal Layer 2 w0.2: MOD1.94 -6.625,14.245 -6.625,7.95 -4.685,6.01 -4.685,2.19 v1(-4.7,2.175)
MOSI: MOD1.95 U1.107 | length 35.4
  Top Layer w0.2: v1(-6.625,2.875) 1.647,2.875 5.272,6.5 U1.107
  Signal Layer 2 w0.2: MOD1.95 -8.875,16.525 -8.875,13.65 -9.125,13.4 -9.125,9.125 -6.95,6.95 -6.95,5.2 -6.625,4.875 v1(-6.625,2.875)
MREQ#: MOD1.46 U1.50 | length 18.5
  Top Layer w0.2: U1.50 -2.25,-10.85 -2.15,-10.75 -2.15,-9.75 v1(-1.725,-9.325)
  Signal Layer 2 w0.2: v1(-1.725,-9.325) -1.025,-9.325 0.1,-10.45 0.1,-11.775 2.15,-13.825 8.745,-13.825 MOD1.46
NetC9_1: C9.1 R1.2 | length 2.4
  Bottom Layer w0.2: C9.1 5.75,-3.525 R1.2
NetC10_1: C10.1 R1.1 U1.83 | length 6.5
  Top Layer w0.2: v1(8.025,-6.425) 8.825,-5.625 9.425,-5.625 9.55,-5.5 U1.83
  Bottom Layer w0.2: C10.1 5.75,-5.475 R1.1 8.025,-5.75 v1(8.025,-6.425)
NetJ1_2: J1.2 U1.121 | length 18.3
  Top Layer w0.2: v1(-6.2,5.9) 1.525,5.9 2.75,7.125 U1.121
  Bottom Layer w0.2: J1.2 -6.65,11.01 -6.65,7.1 -6.2,6.65 v1(-6.2,5.9)
NetJ1_3: J1.3 U1.120 | length 19.1
  Top Layer w0.2: v1(-5.325,5.15) 1.397,5.15 3.25,7.003 U1.120
  Bottom Layer w0.2: J1.3 -6.15,11.45 -6.15,7.475 -5.325,6.65 v1(-5.325,5.15)
NetJ1_4: J1.4 U1.119 | length 8.6
  Top Layer w0.2: J1.4 -0.785,10.225 3.555,10.225 3.75,10.03 U1.119
NetJ1_5: J1.5 U1.118 | length 6.6
  Top Layer w0.2: J1.5 1.315,10.665 3.738,10.665 4.25,10.153 U1.118
NetJ1_6: J1.6 U1.117 | length 4.6
  Top Layer w0.2: J1.6 3.415,11.105 3.92,11.105 4.75,10.275 U1.117
NetJ1_7: J1.7 U1.116 | length 3.5
  Top Layer w0.2: J1.7 5.25,11.81 U1.116
NetJ1_8: J1.8 U1.115 | length 4
  Top Layer w0.2: U1.115 5.75,10.65 J1.8
NetJ1_9: J1.9 U1.114 | length 5.8
  Top Layer w0.2: U1.114 6.25,10.297 6.953,11 7.875,11 9.125,12.25 J1.9
NetR2_2: R2.2 U2.6 | length 2.8
  Bottom Layer w0.2: R2.2 1.59,6.365 U2.6
NMI#: MOD1.52 U1.56 | length 24.4
  Top Layer w0.2: U1.56 0.75,-9.15 v1(0.95,-8.95)
  Signal Layer 1 w0.2: v1(0.95,-8.95) 1.225,-8.675 3.05,-8.675 5.8,-11.425 16,-11.425 16.525,-11.95 16.525,-13.985 MOD1.52
PB0: MOD1.88 U1.100 | length 32.7
  Top Layer w0.2: v1(-0.85,-2.575) 0.645,-2.575 6.385,3.165 9.191,3.165 9.356,3 U1.100
  Signal Layer 1 w0.2: v1(-0.85,-2.575) -0.85,10.525 -1.525,11.2 -1.525,13.715 MOD1.88
PB2: MOD1.90 U1.102 | length 34.1
  Top Layer w0.2: v1(-3.275,-1) 0.975,-1 6.02,4.045 9.555,4.045 9.6,4 U1.102
  Signal Layer 1 w0.2: v1(-3.275,-1) -3.275,5 -5.075,6.8 -5.075,10.275 -4.075,11.275 -4.075,13.705 MOD1.90
PB5: MOD1.93 U1.105 | length 34.4
  Top Layer w0.2: v1(-4.1,1.375) 1.45,1.375 5.575,5.5 U1.105
  Signal Layer 2 w0.2: MOD1.93 -3.8,16.5 -3.8,13.625 -4.075,13.35 -4.075,11.35 -5.025,10.4 -5.025,7.1 -4.06,6.135 -4.06,1.415 v1(-4.1,1.375)
PC0: MOD1.76 U1.90 | length 21.9
  Top Layer w0.2: U1.90 11.85,-2 12.255,-1.595 12.255,7.225 12.545,7.515 12.545,8.709 13.3,9.464 13.3,10.8 14.05,11.55 14.05,13.375 14.65,13.975 16.515,13.975 MOD1.76
PC1: MOD1.77 U1.91 | length 21.7
  Top Layer w0.2: U1.91 11.675,-1.5 11.81,-1.365 11.81,7.402 12.105,7.697 12.105,8.93 12.6,9.425 v1(12.6,9.95)
  Bottom Layer w0.2: v1(12.6,9.95) 13.975,11.325 13.975,16.515 MOD1.77
PD0: MOD1.68 U1.73 | length 20.7
  Top Layer w0.2: U1.73 12.95,-10.5 14.55,-8.9 15.975,-8.9 16.5,-8.375 16.5,3.8 MOD1.68
PD1: MOD1.69 U1.74 | length 20.7
  Top Layer w0.2: U1.74 12.8,-10 14.025,-8.775 14.025,6.405 MOD1.69
PD2: MOD1.70 U1.75 | length 24.8
  Top Layer w0.2: U1.75 12.65,-9.5 13.575,-8.575 13.575,6.625 13.875,6.925 13.875,8.05 14.7,8.875 16.525,8.875 MOD1.70
PD3: MOD1.71 U1.76 | length 22.1
  Top Layer w0.2: U1.76 12.528,-9 13.135,-8.393 13.135,6.86 13.425,7.15 13.425,8.345 MOD1.71
PD4: MOD1.72 U1.77 | length 26.2
  Top Layer w0.2: U1.77 12.4,-8.5 12.695,-8.205 12.695,7.042 12.985,7.332 12.985,8.527 13.75,9.292 13.75,10.55 14.6,11.4 16.54,11.4 MOD1.72
PD5: MOD1.73 U1.78 | length 31.2
  Top Layer w0.2: v1(9.2,-8.9) 9.2,-8.595 9.795,-8 U1.78
  Signal Layer 2 w0.2: v1(9.2,-8.9) 15.975,-8.9 16.5,-8.375 16.5,11.44 MOD1.73
PD6: MOD1.74 U1.79 | length 35.2
  Top Layer w0.2: v1(8.475,-9.4) 8.475,-8.697 9.672,-7.5 U1.79
  Signal Layer 2 w0.2: v1(8.475,-9.4) 8.475,-8.65 8.95,-8.175 12.725,-8.175 13.75,-7.15 13.75,10.55 14.05,10.85 14.05,13.375 14.65,13.975 16.505,13.975 MOD1.74
PD7: MOD1.75 U1.80 | length 35.6
  Top Layer w0.2: v1(7.825,-10.1) 7.825,-8.725 9.55,-7 U1.80
  Signal Layer 2 w0.2: v1(7.825,-10.1) 7.825,-8.6 8.7,-7.725 12.475,-7.725 13.3,-6.9 13.3,10.8 13.61,11.11 13.61,13.61 MOD1.75
PS2KC: MOD1.83 U1.97 | length 20.7
  Top Layer w0.2: v1(6.875,2.225) 7.3,2.225 7.95,1.575 8.3,1.575 8.44,1.435 9.407,1.435 9.472,1.5 U1.97
  Signal Layer 1 w0.2: v1(6.875,2.225) 6.875,10.55 6.1,11.325 6.1,13.275 6.375,13.55 6.375,16.535 MOD1.83
PS2KD: MOD1.82 U1.96 | length 22.7
  Top Layer w0.2: v1(6.975,1.325) 7.175,1.125 8.075,1.125 8.205,0.995 10.695,0.995 U1.96
  Signal Layer 1 w0.2: v1(6.975,1.325) 8.975,1.325 11.475,3.825 11.475,6.725 8.225,9.975 8.225,11.3 8.625,11.7 8.625,14.235 MOD1.82
PS2MC: MOD1.81 U1.95 | length 29.5
  Top Layer w0.2: v1(6.1,1.85) 6.1,1.225 6.655,0.67 7.891,0.67 8.061,0.5 U1.95
  Signal Layer 1 w0.2: v1(6.1,1.85) 6.1,1.1 6.625,0.575 9.1,0.575 12.05,3.525 12.05,8.628 10.5,10.178 v1(10.5,10.825)
  Signal Layer 2 w0.2: MOD1.81 11.45,16.49 11.45,13.625 11.15,13.325 11.15,11.475 v1(10.5,10.825)
PS2MD: MOD1.80 U1.94 | length 28
  Top Layer w0.2: v1(5.425,1.2) 6.395,0.23 7.709,0.23 7.939,0 U1.94
  Signal Layer 1 w0.2: v1(5.425,1.2) 5.425,0.825 6.2,0.05 9.3,0.05 12.75,3.5 12.75,8.55 11.15,10.15 11.15,14.25 MOD1.80
RD#: MOD1.47 U1.51 | length 18.5
  Top Layer w0.2: U1.51 -1.75,-11.05 -1.475,-10.775 v1(-1.475,-10.225)
  Signal Layer 1 w0.2: v1(-1.475,-10.225) -1.475,-11.275 -1.1,-11.65 3.45,-11.65 6.35,-14.55 6.35,-15.875 7,-16.525 8.905,-16.525 MOD1.47
RST#: MOD1.103 U1.55 | length 26.7
  Top Layer w0.2: v1(-0.225,-9.175) 0.25,-9.65 U1.55
  Signal Layer 2 w0.2: v1(-0.225,-9.175) 0.65,-10.05 0.65,-11.525 2.425,-13.3 10.225,-13.3 11.425,-14.5 11.425,-15.875 12.075,-16.525 16.525,-16.525 MOD1.103
RTCXI: MOD1.59 U1.61 | length 17
  Top Layer w0.2: U1.61 3.25,-9.025 v1(3.8,-8.475)
  Signal Layer 1 w0.2: v1(3.8,-8.475) 5.2,-7.075 13.245,-7.075 MOD1.59
RTCXO: MOD1.58 U1.62 | length 18.3
  Top Layer w0.2: U1.62 3.75,-9.85 v1(4.525,-9.075)
  Signal Layer 1 w0.2: v1(4.525,-9.075) 5.175,-9.075 6.225,-8.025 13.775,-8.025 14.65,-8.9 16.5,-8.9 MOD1.58
SCL: MOD1.99 U1.110 | length 34.7
  Top Layer w0.2: v1(-7.275,4.225) -7.05,4 1.497,4 4.882,7.385 7.835,7.385 8.25,7.8 U1.110
  Signal Layer 2 w0.2: MOD1.99 -11.425,16.505 -11.425,14.275 -12.075,13.625 -12.075,11 -7.55,6.475 -7.55,4.5 v1(-7.275,4.225)
SCLK: MOD1.91 U1.103 | length 34.1
  Top Layer w0.2: v1(-2.4,-0.25) 1.075,-0.25 5.825,4.5 U1.103
  Signal Layer 2 w0.2: MOD1.91 -1.275,16.515 -1.275,13.625 -1.525,13.375 -1.525,10.8 -2.4,9.925 v1(-2.4,-0.25)
SD#: MOD1.92 U1.104 | length 34.2
  Top Layer w0.2: v1(-5.5,0.575) 1.275,0.575 5.7,5 U1.104
  Signal Layer 1 w0.2: v1(-5.5,0.575) -5.5,3.75 -7.05,5.3 -7.05,10.3 -6.625,10.725 -6.625,13.695 MOD1.92
SDA: MOD1.98 U1.109 | length 33.4
  Top Layer w0.2: v1(-8.025,3.55) 1.7,3.55 5.095,6.945 8.045,6.945 8.75,7.65 U1.109
  Signal Layer 2 w0.2: MOD1.98 -12.7,10.95 -8.025,6.275 v1(-8.025,3.55)
TP#: MOD1.89 U1.101 | length 33.7
  Top Layer w0.2: v1(0,-1.825) 0.772,-1.825 6.202,3.605 9.373,3.605 9.478,3.5 U1.101
  Signal Layer 1 w0.2: v1(0,-1.825) 0,10.45 1,11.45 1,13.025 1.3,13.325 1.3,16.48 MOD1.89
TPIRQ#: MOD1.79 U1.93 | length 34.6
  Top Layer w0.2: v1(3.975,-0.2) 4.675,0.5 5.45,0.5 6.16,-0.21 7.527,-0.21 7.817,-0.5 U1.93
  Signal Layer 1 w0.2: v1(3.975,-0.2) 4.725,-0.95 9.725,-0.95 13.75,3.075 13.75,10.55 14.05,10.85 14.05,13.775 13.975,13.85 13.975,16.505 MOD1.79
Vrtc: MOD1.60 U1.63 | length 18.6
  Top Layer w0.2: U1.63 4.25,-10.275 5.225,-9.3 v1(5.225,-8.05)
  Signal Layer 1 w0.2: v1(5.225,-8.05) 5.725,-7.55 13.475,-7.55 14.675,-6.35 16.51,-6.35 MOD1.60
WAIT#: MOD1.50 U1.54 | length 17.3
  Top Layer w0.2: U1.54 -0.25,-13.55 -0.175,-13.625 0.925,-13.625 1.35,-14.05 14.05,-14.05 MOD1.50
WR#: MOD1.48 U1.52 | length 17.1
  Top Layer w0.2: U1.52 -1.25,-11.35 v1(-0.7,-10.8)
  Signal Layer 1 w0.2: v1(-0.7,-10.8) -0.325,-11.175 3.875,-11.175 6.525,-13.825 11.285,-13.825 MOD1.48
XIN: MOD1.85 U2.1 | length 12.1
  Bottom Layer w0.2: MOD1.85 6.375,16.485 6.375,14.25 6.075,13.95 6.075,10.95 8.12,8.905 U2.1
XOUT: MOD1.86 U2.8 | length 7
  Bottom Layer w0.2: MOD1.86 3.55,14.23 3.55,9.555 U2.8
ZCL: MOD1.63 U1.67 | length 20
  Top Layer w0.2: U1.67 6.25,-10.975 6.65,-10.575 6.65,-2.275 v1(6.575,-2.2)
  Signal Layer 1 w0.2: v1(6.575,-2.2) 6.765,-2.01 10.09,-2.01 12.1,0 MOD1.63
ZDA: MOD1.65 U1.69 | length 24.6
  Top Layer w0.2: v1(5.35,-1.825) 5.619,-1.556 7.006,-1.556 7.275,-1.825 7.275,-9.65 7.125,-9.8 7.125,-10.575 7.25,-10.7 U1.69
  Signal Layer 1 w0.2: v1(5.35,-1.825) 5.725,-1.45 9.9,-1.45 13.89,2.54 MOD1.65
pads on no net: MOD1.62 MOD1.64 MOD1.66 MOD1.101 MOD1.102 MOD1.104 U1.0 U1.66 U1.68 U1.70 U1.71 U1.85 U1.124 U1.125 U1.126 U1.127 U1.128 U1.129 U1.130 U1.131 U1.132 U1.135 U1.136 U1.137 U1.138 U1.139 U1.140 U1.141 U1.142 U1.143 U2.4

## Polygon pours and split planes (outlines as drawn)
GND on Signal Layer 2 "GND_L03_P002" (solid, remove dead copper, pour order 2): -18.5,-18.5 18.5,-18.5 18.5,18.5 -17.5,18.5 -18.5,17.5
GND on Signal Layer 1 "GND_L02_P000" (solid, remove dead copper, pour order 0): -18.5,-18.5 18.5,-18.5 18.5,18.5 -17.5,18.5 -18.5,17.5
GND on Bottom Layer "GND_L04_P004" (solid, remove dead copper, pour order 4): -18.5,-18.5 18.5,-18.5 18.5,18.5 -17.5,18.5 -18.5,17.5

## Silkscreen, mask and mechanical layers (free items; w line width, h text height)
Top Overlay:
  rectangle: -13.589,12.314 -12.339,13.589
Bottom Overlay:
  text "HEADERS ON THIS SIDE" at -0.925,-2.925 h1.5 r315
  text "(C) KnivD, 2020" at 14.45,-11.75 h1.5
  text "Z20X CPU" at 12.85,-13.575 h1.5
Mechanical 1:
  the board outline again, w0.35